# Altium PCB WX0.000.863.PcbDoc (part 2 of 4)
Units mil, origin at the board's own origin, x right, y up, seen from the top; angles counter-clockwise.
Board outline 6000 x 4000 mil, 2 copper layers (Top Layer, Bottom Layer); 210 components, 152 nets, 629 pads, 401 vias.
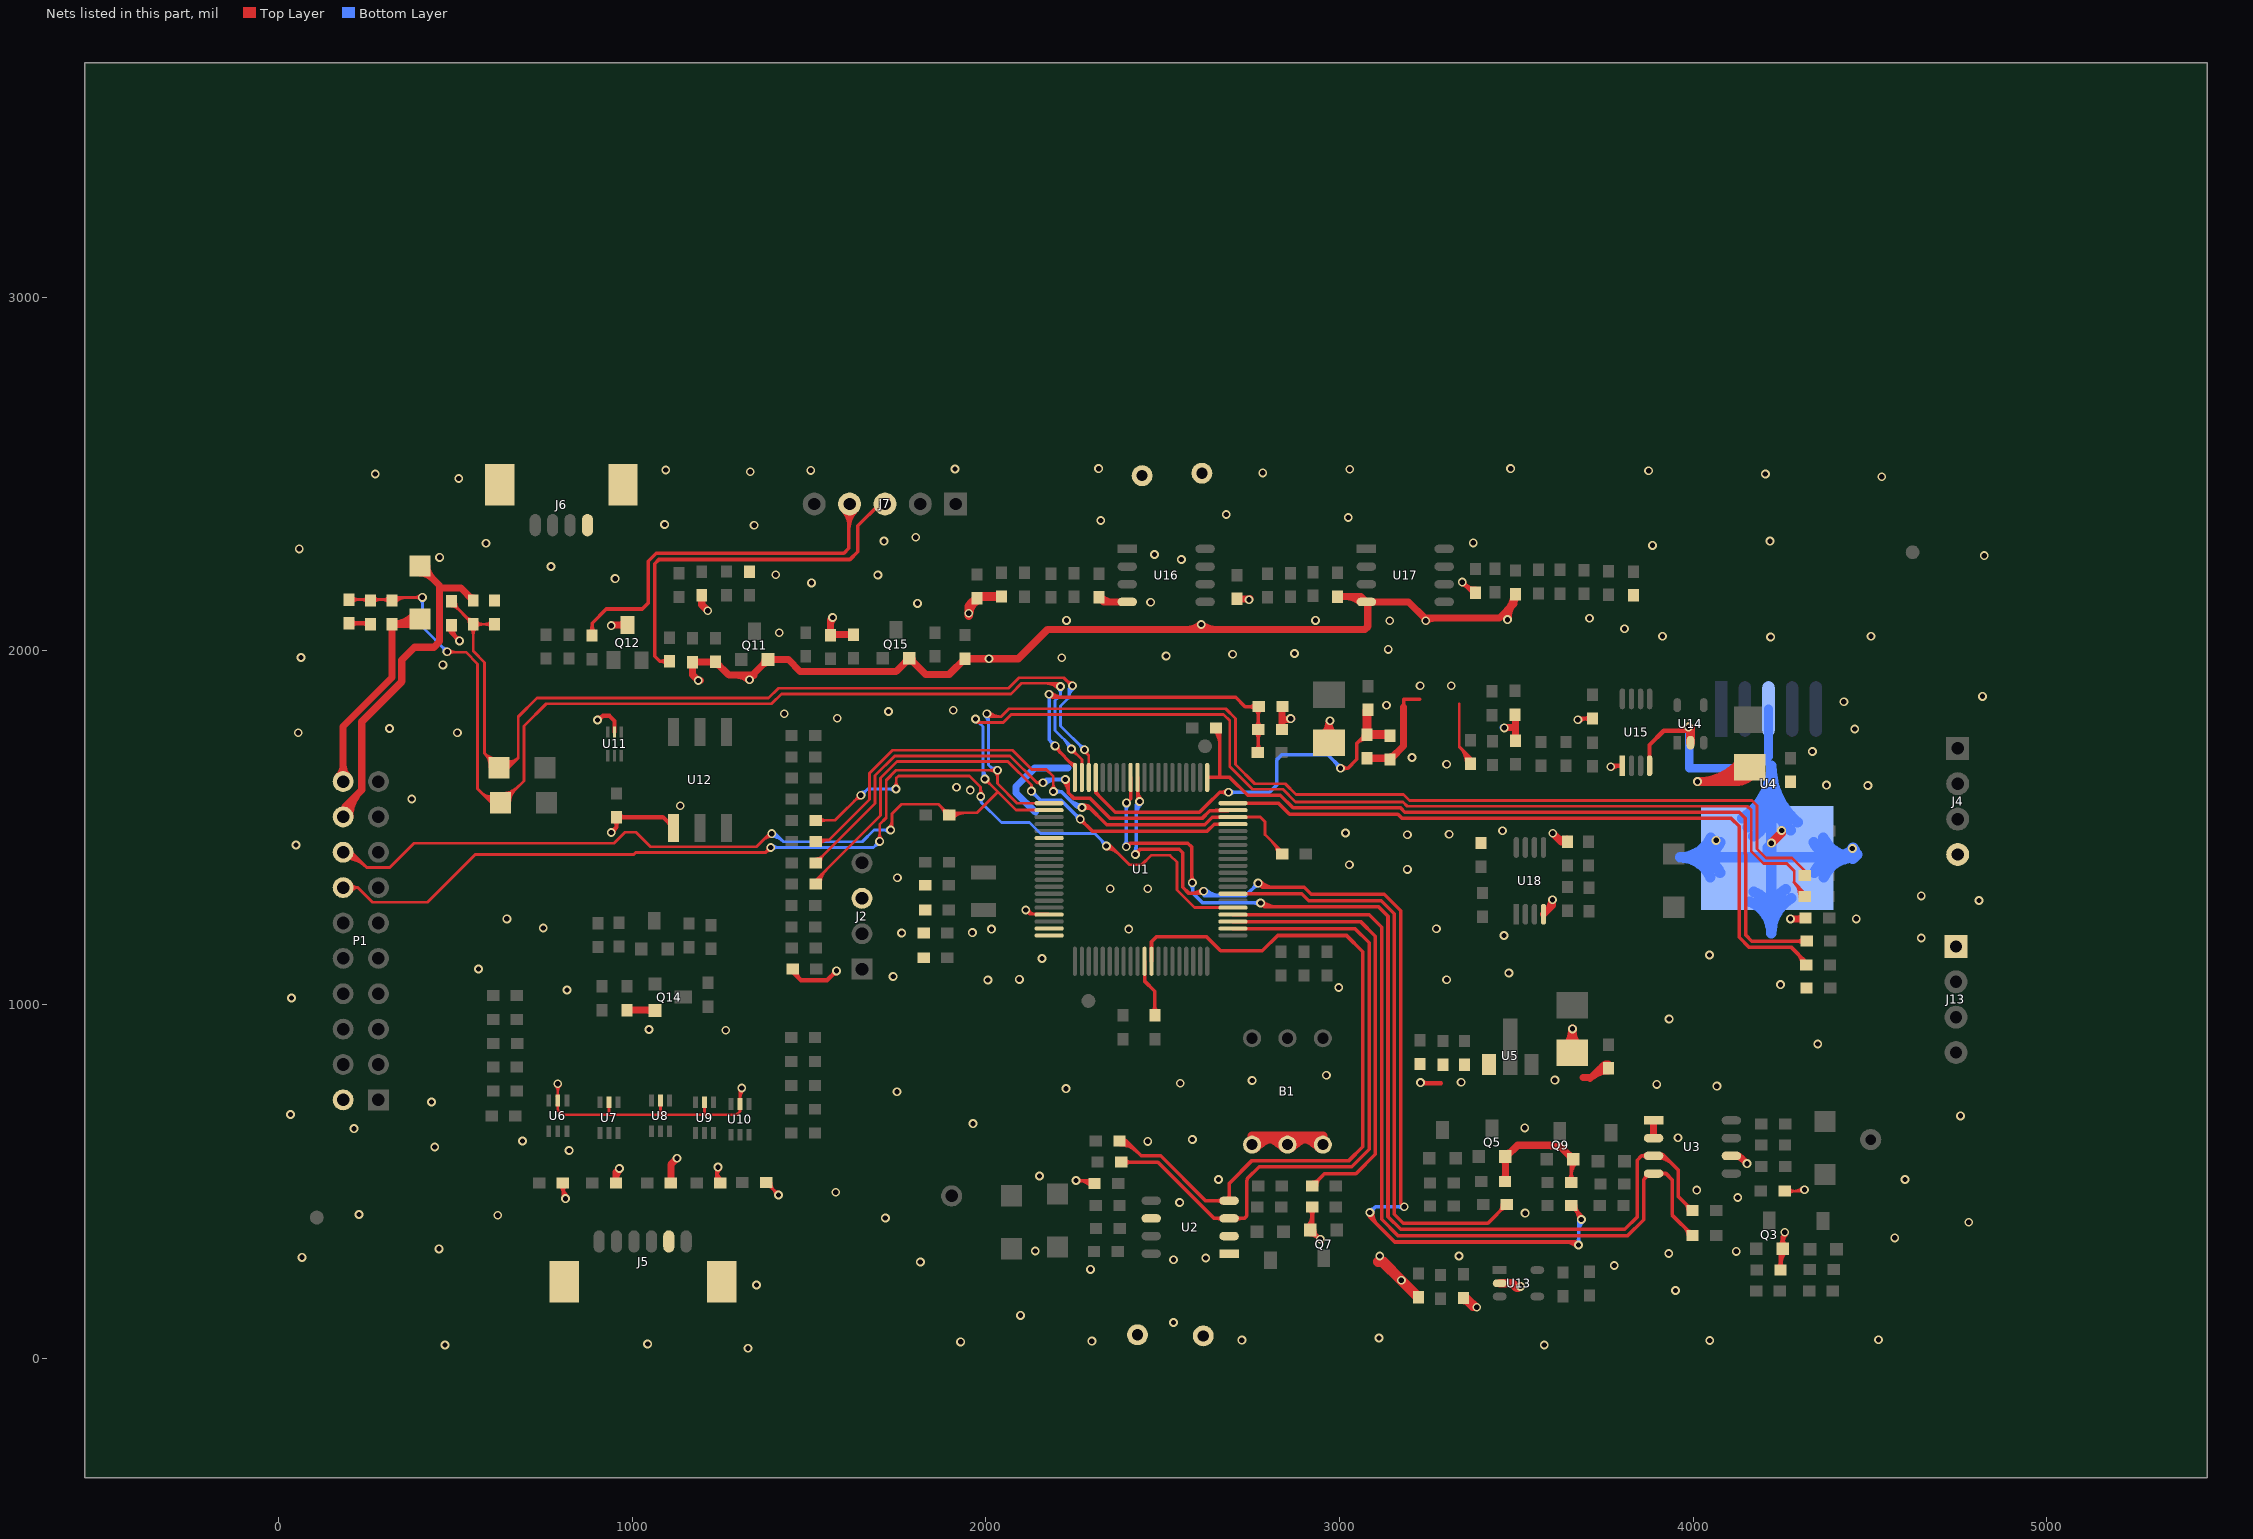
[diagram p2: the nets of this part, all layers, seen from the top]

## Via types
v1: diameter 25, hole 15, Top Layer to Bottom Layer, tented both sides, 401 vias

## Nets (pads, with @x,y where several pads share a name; then routed paths per layer and width w, separated by ;. In a path a pad name is that pad's centre, name@x,y a point inside that pad or via, vN(x,y) a via of type N, cw(c..) or ccw(c..) an arc to the next point about the centre after c; other vN are vias at no path point) (continued)
GND: B1.4 B1.5 B1.6 C1.2 C4.1 C5.1 C6.1 C7.2 C8.2 C10.2 C11.2 C12.1 C13.1 C14.2 C15.1 C16.1 C17.1 C18.1 C19.1 C20.1 C22.2 C23.2 C24.2 C25.2 C26.2 C27.1 C28.1 C29.1 C30.1 C31.1 C32.1 C33.2 C35.2 C36.1 C37.2 C38.2 C39.2 C40.2 C42.2 C44.2 C46.2 C47.2 C48.2 C49.2 J2.3 J4.4 J5.5 J5.7 J5.8 J6.1 J6.5 J6.6 J13.1 P1.2 pad.2 pad.3 pad.4 pad.5 Q3.E Q5.E Q7.E Q9.E Q11.E Q12.3 Q14.E Q15.E R12.1 R14.2 R20.2 R44.2 R54.2 R59.2 R60.2 R73.2 R74.2 R83.1 R86.2 R89.1 R92.2 R103.2 R107.1 R108.2 R112.2 R117.2 U1.17 U2.1 U2.2 U2.6 U3.1 U3.2 U3.6 U4.0 U4.3 U5.1 U6.2 U7.2 U8.2 U9.2 U10.2 U11.2 U12.1 U13.2 U14.2 U15.1 U15.4 U16.4 U17.4 U18.4 | length 15960.5
  Top Layer w8: v1@783.99,769.99 cw(c769.48,755.48) 790,755.48 cw(c810.52,755.48) v1@796.01,769.99 ; U6.2@787.96,716.42 cw(c783.02,711.49) 790,711.49 cw(c796.98,711.49) U6.2@792.04,716.42 ; U6.2@787.96,740.19 ccw(c783.02,745.13) 790,745.13 ccw(c796.98,745.13) U6.2@792.04,740.19 ; v1(790,776) U6.2@790,728.31 790,702 803.97,688.03 935,688.03 ; C22.2@796.38,486.87 cw(c776.75,467.24) 804.51,467.24 cw(c832.27,467.24) C22.2@812.64,486.87 ; 804.51,470.29 ccw(c831.29,470.29) v1@812.35,451.35 ; C22.2@804.51,489.61 ccw(c850.61,489.61) v1@818.01,457.01 ; C22.2@804.51,495 804.51,458.49 v1(812,451) ; U7.2@932.96,711.42 cw(c928.02,706.49) 935,706.49 cw(c941.98,706.49) U7.2@937.04,711.42 ; U7.2@935,723.31 935,688.03 ; U8.2@1077.96,716.42 cw(c1073.02,711.49) 1080,711.49 cw(c1086.98,711.49) U8.2@1082.04,716.42 ; 1080,689.03 U8.2@1080,728.31 ; U9.2@1202.96,711.42 cw(c1198.02,706.49) 1205,706.49 cw(c1211.98,706.49) U9.2@1207.04,711.42 ; U9.2@1205,723.31 1205,688.03 ; U10.2@1302.96,706.42 cw(c1298.02,701.49) 1305,701.49 cw(c1311.98,701.49) U10.2@1307.04,706.42 ; U10.2@1302.96,730.19 ccw(c1298.02,735.13) 1305,735.13 ccw(c1311.98,735.13) U10.2@1307.04,730.19 ; U10.2@1305,731.41 cw(c1342.59,731.41) v1@1316.01,757.99 ; 1305,750.72 cw(c1323.28,750.72) v1@1310.35,763.65 ; v1(1310,764) 1309,765 1305,761 U10.2@1305,718.31 1305,697 1296.03,688.03 1205,688.03 ; C26.2@1379,497 1413.98,462.02 v1(1413.98,461) ; C26.2@1381,485.5 cw(c1381,462.57) 1397.22,478.78 ; C26.2@1392.5,497 ccw(c1425.09,497) 1402.05,473.95 ; 1398.75,477.25 cw(c1382.51,461) v1@1405.48,461 ; 1401.21,474.79 ccw(c1413.98,487.56) v1@1413.98,469.5 ; v1(2113,1267) 2123.84,1256.16 2136.24,1256.16 ; v1@2113.49,1267.09 ccw(c2126.62,1269.52) 2126.62,1256.16 ; v1@2121.36,1268.54 ccw(c2136.24,1271.29) 2136.24,1256.16 ; 2134,1256.16 cw(c2134,1244.34) U1.17@2142.36,1252.7 ; U1.17@2179.14,1254.05 2177.16,1256.03 2136.37,1256.03 ; v1(2254.98,502) C20.1@2312.49,502 ; v1@2258.43,502 cw(c2258.43,446.92) C20.1@2297.38,485.87 ; v1@2260.99,495.99 cw(c2275.51,481.48) 2275.51,502 cw(c2275.51,522.52) v1@2260.99,508.01 ; 2277.75,502 cw(c2277.75,466.24) C20.1@2303.03,491.53 ; 3338.68,1849.32 3338.68,1728.63 3370,1697.31 R89.1@3370,1680 ; 3339.54,1727.77 cw(c3293.77,1682) R89.1@3358.5,1682 ; 3353.2,1714.11 cw(c3321.08,1682) R89.1@3366.5,1682 ; 3366.85,1700.46 cw(c3348.4,1682) R89.1@3374.5,1682 ; C19.1@4258.48,472 v1@4310.98,472 ; C19.1@4268.61,463.87 cw(c4288.24,444.24) 4288.24,472 cw(c4288.24,499.76) C19.1@4268.61,480.13 ; 4284.81,472 ccw(c4284.81,506.18) v1@4308.97,482.01 ; 935,688.03 1205,688.03 ; 2136.24,1256.16 cw(c2136.24,1249.12) 2142.12,1253 ccw(c2136.38,1249.07) 2136.38,1256.03 ; 2136.24,1256.16 2136.37,1256.03
  Top Layer w10: C25.2@1239,497 v1@1239,532.02 ; 1239,512.28 cw(c1270.7,512.28) v1@1248.29,534.7 ; 1239,512.54 ccw(c1260.09,512.54) C25.2@1247.8,495.41 ; v1(1242.98,540) 1242.98,536 v1@1239,532.02 ; C25.2@1253.63,503.53 cw(c1274.05,532.02) v1@1239,532.02 ; 3181.48,1841 3181.48,1862.49 3227.39,1862.49 ; R54.2@3647.56,504.42 ccw(c3629.64,522.35) 3654.98,522.35 ccw(c3680.33,522.35) R54.2@3662.41,504.42 ; R54.2@3654.98,497 3654.98,556 Q9.E@3660.98,562 ; 3654.98,516.13 cw(c3706.85,516.13) Q9.E@3670.18,552.81 ; 3654.98,540.27 cw(c3682.71,540.27) Q9.E@3663.11,559.88
  Top Layer w12: C30.1@199.98,2077.51 258.48,2077.51 R74.2@260.98,2075 ; C30.1@206.7,2070.79 cw(c222.92,2054.57) 222.92,2077.51 cw(c222.92,2100.44) C30.1@206.7,2084.23 ; 236.82,2077.51 cw(c236.82,2052.84) R74.2@254.27,2070.28 ; 239.28,2077.51 ccw(c239.28,2098.71) R74.2@254.27,2083.72 ; C29.1@487.84,2071.77 ccw(c503.89,2062.39) 490.75,2049.25 ; C29.1@490,2072.51 490,2050 ; C29.1@498.2,2065.72 ccw(c517.77,2054.28) 501.74,2038.26 ; v1@505.5,2028 ccw(c489.81,2028) 500.9,2039.1 ccw(c512,2050.19) v1@512,2034.5 ; v1(512,2028) 490,2050 ; v1(902,1804) 906,1804 918,1816 ; v1@902.62,1810.47 ccw(c904.44,1829.56) 918,1816 ; v1(941,1486) 955.98,1500.98 C27.1@955.98,1529.51 1086.94,1529.51 U12.1@1117.2,1499.25 ; v1@941,1492.5 ccw(c941,1508.19) 952.1,1497.1 ccw(c963.19,1486) v1@947.5,1486 ; C27.1@949.27,1520.79 cw(c933.05,1504.57) 955.98,1504.57 cw(c978.92,1504.57) C27.1@962.7,1520.79 ; U11.2@950.3,1769.97 950.3,1801.7 936,1816 918,1816 ; C27.1@962.7,1522.79 cw(c978.92,1506.57) 978.92,1529.51 cw(c978.92,1552.44) C27.1@962.7,1536.23 ; C4.1@1454.14,1100 1454.14,1091.86 1477.6,1068.4 1551.4,1068.4 v1(1578,1095) ; C4.1@1465.23,1098.08 ccw(c1491.88,1092.6) 1472.64,1073.36 ; v1@1571.5,1095 cw(c1555.81,1095) 1566.9,1083.9 cw(c1578,1072.81) v1@1578,1088.5 ; Q7.E@2909.07,370.49 ccw(c2875.49,404.07) 2922.98,404.07 ; R44.2@2916.27,420.28 cw(c2900.05,404.07) 2922.98,404.07 ; Q7.E@2917.56,350 cw(c2917.56,321.03) 2938.04,341.51 cw(c2958.53,362) Q7.E@2929.56,362 ; R44.2@2922.98,427 2922.98,367.42 Q7.E@2917.56,362 2949.56,330 v1@2949.98,330 ; R44.2@2929.7,420.28 ccw(c2945.92,404.07) 2922.98,404.07 ; Q7.E@2930.75,348.81 ccw(c2945.98,364.05) v1@2945.98,342.5 ; v1@3227.98,780 v1(3228.98,779) ; v1@3228.98,784 v1(3228.98,779) ; v1@3233.58,783.6 ccw(c3249.51,799.52) 3249.51,777 ; 3287,777 3230.98,777 v1(3228.98,779) ; v1@3347,2187.5 cw(c3347,2171.81) 3358.1,2182.9 cw(c3369.19,2194) v1@3353.5,2194 ; v1(3347,2194) 3377.02,2163.98 C44.2@3385,2163.98 ; v1@3351.99,2189.01 ccw(c3384.65,2221.66) C44.2@3384.94,2175.48 ; v1(3674,1805) 3672,1805 3675.49,1808.49 C35.2@3715,1808.49 ; v1@3678.6,1800.4 cw(c3698.12,1780.88) 3698.12,1808.49 ; C35.2@3708.28,1801.77 ccw(c3692.07,1785.56) 3692.07,1808.49 ccw(c3692.07,1831.43) C35.2@3708.28,1815.21 ; v1(3767,1672) 3767,1673 3769,1675 U15.1@3800,1675 ; v1@3771.6,1667.4 cw(c3789.94,1649.07) 3789.94,1675 ; U15.4@3876.77,1675 3876.77,1733.77 3917,1774 3977,1774 v1(3987,1784) ; 3947.17,1774 ccw(c3947.17,1823.83) v1@3982.4,1788.6 ; 3976.14,1774 ccw(c3976.14,1794.86) v1@3990.89,1780.11 ; R14.2@4240.27,255.72 ccw(c4224.05,271.93) 4246.98,271.93 ccw(c4269.92,271.93) R14.2@4253.7,255.72 ; Q3.E@4244.5,317.49 ccw(c4224.01,337.97) 4252.98,337.97 ccw(c4281.95,337.97) Q3.E@4261.47,317.49 ; R14.2@4246.98,249 4246.98,303 Q3.E@4252.98,309 4252.98,339.98 4259,346 v1(4259,356) ; 4246.98,265.54 cw(c4296.44,265.54) Q3.E@4261.47,300.51 ; Q3.E@4252.98,325.78 cw(c4289.22,325.78) v1@4263.6,351.4 ; 4252.98,338.89 cw(c4264.43,338.89) v1@4260.97,349.81 ; 490,2050 cw(c507.39,2050) 496.14,2063.26 ccw(c507.39,2050) 490,2050 ; 490,2050 ccw(c472.61,2050) 483.86,2063.26 cw(c472.61,2050) 490,2050
  Top Layer w20: v1(941,2071) 943,2073 Q12.3@987,2073 ; C23.2@954.51,495 954.51,526.51 v1(964,536) ; C23.2@954.51,507.05 cw(c992.95,507.05) v1@965.77,534.23 ; Q12.3@979.93,2065.93 ccw(c962.86,2048.86) 962.86,2073 ccw(c962.86,2097.14) Q12.3@979.93,2080.07 ; R59.2@985,983.98 1064,983.98 Q14.E@1065,982.98 ; 1043.27,983.98 cw(c1043.27,961.26) Q14.E@1059.34,977.33 ; C24.2@1109.51,495 1109.51,547.52 v1(1126.98,565) ; v1@1194,1916 v1(1187,1916) 1171,1932 R103.2@1171,1968 1235.51,1968 C38.2@1236,1968.49 1273.49,1931 1340,1931 Q11.E@1384,1975 1441.83,1975 1475.13,1941.7 1746.7,1941.7 Q15.E@1784,1979 1829.6,1933.4 1896.91,1933.4 C39.2@1941,1977.49 v1(2009,1977.49) 2092,1977.49 2175.11,2060.6 3072.6,2060.6 3080,2068 3080,2134 U17.4@3076,2138 ; C36.1@1197,2156.51 1197,2130 v1(1214,2113) ; C36.1@1201.08,2150.83 ccw(c1214.88,2138.39) 1201.75,2125.25 ; C38.2@1236,1960.99 cw(c1236,1942.88) C38.2@1248.8,1955.69 ; 1294.58,1931 cw(c1294.58,1880.58) v1@1330.23,1916.23 ; 1342.86,1931 cw(c1342.86,1928.86) 1344.37,1930.37 ; Q11.E@1376,1975 cw(c1356.69,1975) 1370.34,1961.34 cw(c1384,1947.69) Q11.E@1384,1967 ; Q11.E@1389.66,1969.34 cw(c1403.31,1955.69) 1403.31,1975 cw(c1403.31,1994.31) Q11.E@1389.66,1980.66 ; 1561,2073.48 cw(c1587.52,2073.48) v1@1568.77,2092.23 ; v1(1567,2094) 1561,2088 R107.1@1561,2044 1562.51,2045.51 C40.2@1626,2045.51 ; Q15.E@1776,1979 cw(c1756.69,1979) 1770.34,1965.34 cw(c1784,1951.69) 1784,1971 cw(c1784,1951.69) 1797.66,1965.34 cw(c1811.31,1979) Q15.E@1792,1979 ; C39.2@1928.2,1964.69 cw(c1941,1951.88) C39.2@1941,1969.99 ; R108.2@2320,2151 2333,2138 U16.4@2400,2138 ; R108.2@2323.89,2152.89 ccw(c2359.83,2188.83) 2359.83,2138 ; 2570.61,2060.6 ccw(c2570.61,2112.39) v1@2607.23,2075.77 ; 2596.63,2061.63 ccw(c2599.1,2064.1) 2599.1,2060.6 ; v1@2610.77,2075.77 ccw(c2647.39,2112.39) 2647.39,2060.6 ; 2618.9,2060.6 ccw(c2618.9,2064.1) 2621.37,2061.63 ; C42.2@2710,2146.49 2746.39,2146.49 2746.9,2147 2746.9,2146.9 v1(2744,2144) ; C31.1@2837.49,1777 2837.49,1806 ; R92.2@2839,1842 2837.49,1840.49 2837.49,1806 ; v1(2862,1808) 2865,1808 2863,1806 2837.49,1806 ; C10.2@2952.32,1761.06 ccw(c2920.47,1799) v1@2970,1799 ; C10.2@2970,1740 v1@2970,1799 ; 2970,1788.72 cw(c2986.28,1788.72) v1@2974.77,1800.23 ; v1(2973,1802) v1@2970,1799 ; C10.2@2987.68,1761.06 cw(c3019.53,1799) v1@2970,1799 ; R112.2@2995,2153 3061,2153 U17.4@3076,2138 ; 3019.4,2153 cw(c3019.4,2096.96) U17.4@3059.03,2136.59 ; U17.4@3074.59,2136.59 cw(c3061.51,2123.51) 3080,2123.51 ; U17.4@3076.29,2137.71 cw(c3072.63,2134.04) U17.4@3077.56,2132.43 ; R86.2@3077.98,1696 3146.48,1696 3181.48,1731 3181.48,1841 ; 3126.11,1696 cw(c3126.11,1677.63) C28.1@3139.1,1690.62 ; C28.1@3142.98,1700.01 ccw(c3142.98,1718.12) C28.1@3155.79,1705.31 ; 3236.78,2096.39 cw(c3225.4,2085) v1@3241.5,2085 ; v1@3245.77,2083.23 cw(c3267.42,2061.58) 3267.42,2092.2 ; R12.1@3362.8,157.2 ccw(c3350,144.39) 3350,162.5 cw(c3350,115.42) v1@3383.29,148.71 ; R12.1@3363.25,156.75 ccw(c3388,181.51) v1@3388,146.5 ; Q5.E@3463.33,564.34 cw(c3449.67,550.69) 3468.98,550.69 cw(c3488.3,550.69) Q5.E@3474.64,564.34 ; R20.2@3464.1,503.89 ccw(c3452.29,515.69) 3468.98,515.69 ; v1(3466,1782) 3472,1782 3473,1783 3498,1783 ; R20.2@3467.98,500 3468.98,501 Q5.E@3468.98,570 3471.98,570 3503.98,602 3594.81,602 3597.61,599.2 3623.78,599.2 Q9.E@3660.98,562 ; Q5.E@3468.98,578 ccw(c3468.98,604.56) 3487.76,585.78 ; 3474.47,2114.47 ccw(c3430.94,2158) R117.2@3492.5,2158 ; v1@3477.48,2088.3 cw(c3530.84,2094.82) 3492.83,2132.83 ; C12.1@3492.1,1813.62 cw(c3477.84,1799.36) 3498,1799.36 ; 3492.83,2132.31 cw(c3523.6,2132.31) R117.2@3501.88,2154.1 ; C12.1@3495.98,1819.51 3498,1817.49 3498,1783 ; R60.2@3498,1746 3498,1783 ; R117.2@3498,2160 3492.83,2160 3492.83,2132.83 ; U18.4@3576.77,1255 3602,1280.23 v1(3602,1296) ; 3586.58,1264.81 ccw(c3555.39,1296) v1@3599.5,1296 ; v1(3603,1484) 3627,1460 R83.1@3645,1460 ; 3613,1474 ccw(c3633.48,1494.48) R83.1@3643.16,1467.18 ; Q9.E@3652.98,562 ccw(c3633.67,562) 3647.33,575.66 ccw(c3660.98,589.31) Q9.E@3660.98,570 ; 3688,793 3711,793 3737.51,819.51 C18.1@3760,819.51 ; 3708.8,790.8 cw(c3760,739.6) C18.1@3760,812.01 ; 3726.26,808.26 cw(c3746.65,787.88) C18.1@3757.86,814.44 ; 3742.94,824.94 cw(c3760,807.89) C18.1@3760,832.01 ; U3.2@3887.98,622 U3.1@3887.98,672 ; U3.6@4107.98,572 4129.98,572 v1(4151.98,550) ; U3.6@4123.54,570 cw(c4123.54,549.62) 4137.95,564.03 ; v1(4275,1242) 4315.51,1242 C32.1@4317.51,1244 ; 4297.4,1242 ccw(c4297.4,1262.11) C32.1@4311.62,1247.89 ; U17.4@3076,2138 3195.17,2138 3240.97,2092.2 3452.2,2092.2 3492.83,2132.83 ; v1@1334.5,1918 cw(c1352.61,1918) 1339.8,1930.8 ccw(c1352.61,1918) v1@1334.5,1918 ; R12.1@3350,170 3376,144 v1(3388,144) 3362,170 R12.1@3350,170
  Top Layer w25: v1@1952,2099.93 cw(c2003.7,2099.93) C47.2@1976.57,2143.94 ; v1@1952,2115.35 cw(c1980.65,2115.35) C47.2@1975.54,2143.54 ; C47.2@1965.78,2139.27 ccw(c1999.06,2106) v1(1952,2106) 1952,2125.49 C47.2@1975,2148.49 1980,2153.49 C48.2@2045,2153.49 ; B1.4@2744.58,612.03 cw(c2784.6,572) 2784.6,628.61 ; B1.4@2753,628.61 B1.6@2953,628.61 ; 2761.04,628.61 cw(c2761.04,511.65) B1.5@2843.74,594.35 ; B1.4@2762.26,594.35 cw(c2844.96,511.65) 2844.96,628.61 ; 2821.4,628.61 cw(c2821.4,572) B1.5@2861.42,612.03 ; B1.5@2844.58,612.03 cw(c2884.6,572) 2884.6,628.61 ; 2861.04,628.61 cw(c2861.04,511.65) B1.6@2943.74,594.35 ; B1.5@2862.26,594.35 cw(c2944.96,511.65) 2944.96,628.61 ; 2921.4,628.61 cw(c2921.4,572) B1.6@2961.42,612.03 ; U13.2@3453,211.6 3488.4,211.6 3501,199 v1@3505,199 ; C14.2@3640.31,881.04 ccw(c3597.63,923.72) 3657.98,923.72 ccw(c3718.34,923.72) C14.2@3675.66,881.04 ; C14.2@3657.98,863.36 3657.98,930 v1(3658.98,931) ; U14.2@3992.4,1740 3992.4,1778.6 v1(3987,1784) cw(c3973.96,1770.96) 3992.4,1770.96 ; 4066.04,1630 ccw(c4066.04,1743.43) C11.2@4152.5,1670 ; 4120.08,1630 ccw(c4120.08,1697.54) C11.2@4171.55,1653.82 ; C11.2@4129.29,1660.72 cw(c4106.07,1651.43) 4123.75,1633.75 cw(c4150.95,1606.55) C11.2@4151.89,1645.01 ; C11.2@4133.45,1686.18 cw(c4012.01,1789.33) v1(4012,1630) 4120,1630 C11.2@4160,1670 ; v1(4221,1456) 4250,1485 v1(4250,1492) cw(c4233.1,1492) 4245.05,1480.05
  Top Layer w30: 3110,272 3123,272 v1(3174.9,220.1) 3222.51,172.49 C1.2@3223,172.49
  Bottom Layer w8: v1@1310,763 v1(1310,764)
  Bottom Layer w12: v1@3766,1675 3766,1673 v1(3767,1672)
  Bottom Layer w20: 2140,1544 2085.71,1598.29 2085.71,1616.29 2137.42,1668 2232,1668 ; v1(2862,1808) 2864.2,1808 v1@2865.2,1807 ; v1@3463,1783 3463.3,1783 3464.3,1782 v1(3466,1782)
  Bottom Layer w25: v1@3989,1782 3989,1668 4180,1668 4213,1701 U4.3@4213,1835.18 ; U4.0@4209.06,1414.02 4209.06,1416 4209.06,1444.06 v1(4221,1456) ccw(c4249.82,1427.18) U4.0@4209.06,1427.18
  Bottom Layer w30: 4009.07,1416 cw(c4009.07,1343.02) U4.0@4075.82,1372.52 ; 4010.47,1416 ccw(c4010.47,1489.63) U4.0@4076.98,1458.05 ; U4.0@4048.38,1360.4 ccw(c3963.01,1322.66) 3963.01,1416 ; U4.0@4049.88,1470.92 cw(c3963.01,1512.17) 3963.01,1416 ; U4.0@4138.72,1526.46 ccw(c4045.81,1674.99) 4221,1674.99 ; U4.0@4154.63,1501.03 ccw(c4079.68,1620.84) 4221,1620.84 ; U4.0@4160.45,1290.61 cw(c4125.41,1201.67) 4221,1201.67 cw(c4335.5,1201.67) U4.0@4276.92,1300.05 ; U4.0@4170.54,1475.6 ccw(c4113.56,1566.68) 4221,1566.68 ; U4.0@4171.44,1318.52 cw(c4142.77,1245.74) 4221,1245.74 ; 4221,1202 U4.0@4221,1416 ; 4221,1254.45 cw(c4304.07,1254.45) U4.0@4261.57,1325.83 ; 4221,1610.12 ccw(c4375.72,1610.12) U4.0@4275.53,1492.23 ; U4.0@4294.96,1515.09 cw(c4430.84,1674.99) 4221,1674.99 ; U4.0@4340.98,1458.4 ccw(c4408.33,1490.7) 4408.33,1416 ; U4.0@4342.15,1372.16 cw(c4409.74,1341.98) 4409.74,1416 ; U4.0@4368.03,1471.37 ccw(c4455.99,1513.56) 4455.99,1416 ; U4.0@4369.54,1359.93 cw(c4455.99,1321.32) 4455.99,1416 ; U4.0@4395.68,1416 ccw(c4395.68,1495.32) v1@4451.77,1439.23 ; 4451.5,1411.5 ccw(c4435.73,1427.27) v1@4451.8,1442.73 ; 4464,1424 4456,1416 ; 3963,1416 4209.06,1416 U4.0@4221,1416 ; U4.0@4221,1416 4456,1416 ; U4.0@4221,1416 v1(4221,1456) 4221,1675
  other v1: 1328,28 471,37 3579,37 1044,40 1929,46 2300,48 4047,50 2724,51 4524,52 3112,57 2531,101 2098,121 3950,191 3512,203 1352,207 2295.98,251 3777,262 1815,272 2531,278 2622,283 67,285 3113.98,289 3338,289 3931,296 4122,302 2140,303 454,309 2945.98,336 4570,340 4779,384 1716,396 620,404 228,406 3525,410 2548,440 4125.98,454 1576,469 4009.98,475 4314.98,476 2658,505 4599,505 2151.98,515 822,587 442,597 2458,613 690,614 2584,618 3956.98,623 214,649 3524,651 1964,663 4756,685 34,689 433,724 1749,753 2227,762 4067,769 3897,774 2550,777 3343.98,780 2753,785 3608.98,786 2963,800 4352,888 1265,927 1048,929 3932,959 37,1018 816,1041 2998,1048 4247,1056 2006,1069 3303,1070 2095,1071 1738,1079 3479,1089 566.02,1100 2158.98,1130 4046,1140 4645,1188 3465,1195 1762,1202 1962,1203 2015.98,1213 2404,1213 3274,1214 749,1216 646,1242 4461,1242 4808,1294 4645,1307 2352,1327 2458,1327 1750,1358 3192,1382 3028,1395 4450,1441 50,1451 4065,1464 3192,1480 3310,1481 3017,1485 3461,1491 1136,1562 377,1581 1956,1606 1917,1614 4494,1619 4377,1620 3303,1679 3205,1698 4337,1715 56,1768 506,1768 4457,1779 314,1780 1580,1809 1430,1822 1725,1828 1908,1832 3133,1846 4426,1856 4818,1871 3228,1901 3316,1901 1332,1918 465,1960 2215,1980 64,1981 2510,1985 2698,1990 2873,1992 3138,2004 4219,2039 3913,2041 4503,2041 1416,2051 3806,2062 2609,2074 3142,2085 3244,2085 2228,2086 2932,2086 3475,2088 3707,2092 1807,2134 2466,2137 1507,2192 952,2204 1695,2214 1406,2215 771,2238 2553,2258 456,2264 4823,2269 2477,2272 59,2288 3885,2298 587,2304 3378,2305 1712,2310 4217,2310 1802,2321 1345,2355 1092,2357 2325,2368 3025,2377 2680,2385 510,2487 4533,2492 274,2500 4204,2500 2783,2503 1334,2506 3874,2509 1505,2510 1095,2511 3029,2513 1913,2514 2319,2515 3484,2515
INA1_SCL: R29.1 U1.32 U2.4 | length 2335.7
  Top Layer w10: R29.1@2378,614 2397,614 ; R29.1@2380,603.5 cw(c2380,537.11) 2426.95,584.05 ; R29.1@2380,613.5 cw(c2380,571.25) 2409.87,601.13 ; R29.1@2380.33,613.62 cw(c2388.83,603.93) 2397.95,613.05 ; R29.1@2386.92,606.11 cw(c2395.89,595.89) 2405.5,605.5 ; R29.1@2389.39,609.3 cw(c2397,605.49) 2397,614 ; R29.1@2389.39,618.7 ccw(c2397,622.51) 2397,614 ; U1.32@2468.51,1122.16 2468.51,1177.53 2482.98,1192 2623.81,1192 2663.81,1152 2782.01,1152 2825,1194.99 3019.99,1194.99 3065.98,1149 3065.98,597.58 3027,558.6 2752.6,558.6 2687.98,493.98 U2.4@2687.98,445 ; U2.4@2662.98,445 U2.4@2687.98,445 ; U2.4@2667.48,440.05 ccw(c2655.53,428.1) 2655.53,445 ccw(c2655.53,461.9) U2.4@2667.48,449.95 ; U2.4@2683.03,449.95 ccw(c2671.08,461.9) 2687.98,461.9 ccw(c2704.88,461.9) U2.4@2692.93,449.95 ; 2397,614 2439.2,571.8 2461.37,571.8 2494.2,571.8 2621,445 U2.4@2687.98,445
INA1_SDA: R28.1 U1.42 U2.3 | length 2062.7
  Top Layer w10: R28.1@2383,554 2454,554 2486.83,554 2645.83,395 U2.3@2687.98,395 2731,395 2738,402 2738,405.57 2737.68,405.88 2737.68,502 2739.68,504 2739.68,507.8 2772.68,540.8 3034.37,540.8 3083.78,590.21 3083.78,1174.2 3043.31,1214.68 2849.98,1214.68 ; R28.1@2392.42,546.58 cw(c2410.35,528.65) 2410.35,554 cw(c2410.35,579.35) R28.1@2392.42,561.42 ; U2.3@2667.48,390.05 ccw(c2655.53,378.1) 2655.53,395 ccw(c2655.53,411.9) U2.3@2667.48,399.95 ; U1.42@2698.83,1214.68 2849.98,1214.68 ; U2.3@2708.49,390.05 cw(c2720.44,378.1) 2720.44,395 cw(c2720.44,411.9) U2.3@2708.49,399.95 ; 2925.31,1214.68 2849.98,1214.68
INA1_TS1: R39.2 U1.43 | length 1404.7
  Top Layer w10: U1.43@2698.83,1234.36 3059.62,1234.36 3101.58,1192.4 3101.58,655 ; 2951.98,516 R39.2@2922.98,487 2956.98,521 3046.58,521 3101.58,576 3101.58,655 ; 3101.58,623 3101.58,655 ; R39.2@2924.98,497.5 ccw(c2924.98,518.02) 2939.49,503.51 cw(c2924.98,518.02) R39.2@2924.98,497.5 ; R39.2@2935.48,487 cw(c2965.66,487) 2944.32,508.34 ccw(c2965.66,487) R39.2@2935.48,487
INA1_TS2: R19.2 U1.47 | length 1719.6
  Top Layer w10: U1.47@2698.83,1313.1 2893,1313.1 2912.69,1293.42 3118.36,1293.42 3154.98,1256.79 3154.98,1072 3154.98,407 3180.18,381.8 3419.78,381.8 R19.2@3472.98,435 ; 3451.65,413.66 ccw(c3430.31,435) R19.2@3460.48,435 ; 3456.47,418.49 cw(c3470.98,403.98) R19.2@3470.98,424.5
INA2_SCL: R47.1 U1.44 U3.4 | length 2510.2
  Top Layer w10: U1.44@2698.83,1254.05 3083.94,1254.05 3119.38,1218.6 3119.38,392.25 3165.44,346.2 3814.36,346.2 3859.78,391.63 3859.78,505 3876.78,522 U3.4@3887.98,522 3922.98,522 3940.18,504.8 3940.18,404.8 R47.1@3997.98,347 ; 3861.96,507.18 ccw(c3852.14,517) U3.4@3865.63,520.32 ; U3.4@3908.49,517.05 cw(c3920.44,505.1) 3920.44,522 cw(c3920.44,538.9) U3.4@3908.49,526.95 ; 3976.65,368.34 cw(c3955.31,347) R47.1@3985.48,347 ; 3981.47,363.51 ccw(c3995.98,378.02) R47.1@3995.98,357.5
INA2_SDA: R46.1 U1.72 U3.3 | length 3561.8
  Top Layer w10: v1(2397,1446) 2399.8,1446 2410,1456.2 ; v1(2398,1570) 2409.46,1581.46 U1.72@2409.46,1641.84 ; v1@2398.95,1453.24 ccw(c2401.92,1464.28) 2410,1456.2 ; v1@2404.5,1446 cw(c2415.85,1446) 2407.82,1454.02 ; v1@2578.7,1349.3 ccw(c2570.72,1357.28) 2582,1357.28 ; 2582,1366.93 ccw(c2606.94,1366.93) v1@2589.3,1349.3 ; v1(2584,1344) 2582,1344 2582,1445.2 2571,1456.2 2410,1456.2 ; v1@2775.23,1285.23 ccw(c2798.44,1308.44) 2798.44,1275.62 ; v1(2777,1287) 2778,1287 2778,1286 2788.38,1275.62 3022,1275.62 ; v1@2782.3,1292.3 ccw(c2822.59,1332.59) 2822.59,1275.62 ; 2999.98,1275.62 3022,1275.62 ; U3.3@3867.48,567.05 ccw(c3855.53,555.1) 3855.53,572 ccw(c3855.53,588.9) U3.3@3867.48,576.95 ; U3.3@3901.81,574.45 cw(c3908.55,564.91) 3916.81,573.17 ; U3.3@3903.54,565 cw(c3903.54,513.24) 3940.15,549.84 ; U3.3@3903.54,575 cw(c3903.54,547.38) 3923.07,566.91 ; U3.3@3907.58,566.28 cw(c3915.5,555.08) 3925.2,564.78 ; U3.3@3909.04,567.66 cw(c3917.98,560.61) 3917.98,572 ; U3.3@3909.04,576.34 ccw(c3917.98,583.39) 3917.98,572 ; 3976.65,438.34 cw(c3955.31,417) R46.1@3985.48,417 ; 3981.47,433.51 ccw(c3995.98,448.02) R46.1@3995.98,427.5 ; R46.1@3997.98,417 3957.98,457 3957.98,532 3917.98,572 ; 3022,1275.62 3110.98,1275.62 3137.18,1249.42 3137.18,399.63 3172.81,364 3806.98,364 3841.98,399 3841.98,560 3853.98,572 U3.3@3887.98,572 3917.98,572
  Bottom Layer w10: v1@2391.7,1451.3 ccw(c2378.89,1464.11) 2397,1464.11 ccw(c2415.11,1464.11) v1@2402.3,1451.3 ; v1@2392.7,1564.7 cw(c2382.31,1554.31) 2397,1554.31 ; v1(2397,1446) 2397,1569 v1(2398,1570) ; 2397,1549.48 cw(c2418.52,1549.48) v1@2403.3,1564.7 ; v1@2578.7,1338.7 cw(c2563.48,1323.48) 2585,1323.48 ; v1(2584,1344) 2585,1343 2585,1315 2613,1287 v1(2777,1287) ; 2585,1328.31 cw(c2599.69,1328.31) v1@2589.3,1338.7 ; v1@2771.7,1281.7 ccw(c2758.89,1268.89) 2758.89,1287 ccw(c2758.89,1305.11) v1@2771.7,1292.3
INA2_TS: R53.2 U1.71 | length 3503.9
  Top Layer w10: v1@2423,1426 2435.4,1438.4 ; v1@2423,1431.5 ccw(c2423,1444.78) 2432.39,1435.39 ; v1@2429.14,1576.86 U1.71@2429.14,1641.84 ; U1.71@2429.14,1606.25 ccw(c2467.25,1606.25) v1@2440.3,1579.3 ; v1@2430.47,1424.7 cw(c2447.49,1426.31) 2435.4,1438.4 ; 2585.82,1315 ccw(c2585.82,1350.18) v1@2610.7,1325.3 ; v1@2611,1315 2573,1315 2557,1331 2557,1428.4 2547,1438.4 2435.4,1438.4 ; v1@2768.23,1341.23 ccw(c2793.17,1366.17) 2793.17,1330.9 ; v1(2770,1343) 2782.1,1330.9 2900.37,1330.9 2920.06,1311.22 3126.78,1311.22 3172.78,1265.22 3172.78,438.22 ; v1@2775.3,1348.3 ccw(c2817.31,1390.31) 2817.31,1330.9 ; v1@3083.5,412 ccw(c3108.85,412) 3090.92,394.08 ; v1(3086,412) 3086,399 ; v1@3093.5,412 ccw(c3142.99,412) 3108,377 ; 3637.6,328.4 cw(c3637.6,281.61) v1@3670.68,314.7 ; R53.2@3654.98,432 v1@3683.98,403 ; R53.2@3656.98,421.5 cw(c3656.98,400.98) 3671.49,415.49 ; 3661.74,328.4 cw(c3661.74,305.76) v1@3677.75,321.77 ; R53.2@3663.4,423.58 cw(c3631.82,392) v1@3676.48,392 ; R53.2@3667.48,432 ccw(c3697.66,432) 3676.32,410.66 ; v1(3675.98,320) 3667.58,328.4 3156.6,328.4 3086,399 ; 3680.47,406.51 cw(c3665.96,392) v1@3686.48,392 ; 3086,399 cw(c3093.52,399) 3089.75,405.51 ccw(c3093.52,399) 3086,399 ; 3086,399 ccw(c3078.48,399) 3082.25,405.51 cw(c3078.48,399) 3086,399
  Bottom Layer w10: v1@2417.7,1429.3 ccw(c2400.07,1446.93) 2425,1446.93 ; v1@2425,1424 2425,1564 ; 2425,1437.28 ccw(c2436.28,1437.28) v1@2428.3,1429.3 ; 2425,1531.75 cw(c2477.25,1531.75) v1@2440.3,1568.7 ; 2425,1555.89 cw(c2453.11,1555.89) v1@2433.23,1575.77 ; v1@2614.23,1318.23 ccw(c2638.94,1342.93) 2638.94,1308 ; v1@2618,1308 2735,1308 v1(2770,1343) ; v1@2621.3,1325.3 ccw(c2663.08,1367.08) 2663.08,1308 ; v1@2762.5,1343 cw(c2744.39,1343) 2757.2,1330.2 cw(c2770,1317.39) v1@2770,1335.5 ; v1(3086,412) 3102,428 v1(3183,428) ; v1@3086,419.5 ccw(c3086,437.61) 3098.8,424.8 ccw(c3111.61,412) v1@3093.5,412 ; v1@3177.7,422.7 ccw(c3164.89,409.89) 3164.89,428 ccw(c3164.89,446.11) v1@3177.7,433.3 ; v1@3670.68,325.3 ccw(c3657.88,338.11) 3675.98,338.11 ccw(c3694.09,338.11) v1@3681.29,325.3 ; v1(3675.98,320) v1@3675.98,384 ; 3675.98,354.58 cw(c3721.4,354.58) v1@3689.29,386.7 ; 3675.98,378.72 cw(c3697.26,378.72) v1@3682.22,393.77
  other v1: 3683.98,392 2616,1320 2423,1424 2435,1574
INA_SCL: U1.19
INA_SDA: U1.20
INTP2: R31.2 U1.45 | length 1822.9
  Top Layer w8: R31.2@1518.78,1520.64 1573.64,1520.64 1646.9,1593.9 v1(1646.9,1591.53) ; R31.2@1528.91,1512.5 cw(c1548.54,1492.87) 1548.54,1520.64 cw(c1548.54,1548.4) R31.2@1528.91,1528.77 ; 1628.35,1575.35 cw(c1646.9,1556.8) v1@1646.9,1583.03 ; 1634.06,1581.06 ccw(c1623.59,1591.53) v1@1638.4,1591.53 ; v1@1739.99,1615.01 ccw(c1723.07,1631.93) 1747,1631.93 ; v1(1746,1609) 1747,1608 1747,1640.06 1753.14,1646.2 1954,1646.2 1985,1615.2 1985,1588 v1(1986,1588) ; 1747,1627.11 ccw(c1764.11,1627.11) v1@1752.01,1615.01 ; v1@1979.99,1594.01 ccw(c1967.89,1606.11) 1985,1606.11 ; 1985,1610.93 ccw(c2008.93,1610.93) v1@1992.01,1594.01 ; v1@2341,1439.5 cw(c2341,1390.01) 2376,1425 ; v1@2341,1447.5 cw(c2341,1417.32) 2362.34,1438.66 ; v1(2341,1448) 2342,1449 v1@2347,1449 ; v1@2352,1449 2406,1395 2441,1395 2467.6,1421.6 2521,1421.6 2540.2,1402.4 2540.2,1324.04 2590.51,1273.73 U1.45@2698.83,1273.73
  Bottom Layer w8: v1(1646.9,1591.53) 1648.53,1591.53 1666,1609 v1(1746,1609) ; v1@1646.9,1600.03 ccw(c1646.9,1624.5) 1664.2,1607.2 ; v1@1655.4,1591.53 cw(c1671.97,1591.53) 1660.25,1603.25 ; v1@1739.99,1602.99 ccw(c1725.48,1588.48) 1725.48,1609 ccw(c1725.48,1629.52) v1@1739.99,1615.01 ; v1@1981.54,1580.77 cw(c1975.49,1570.97) 1987,1570.97 cw(c2001.58,1570.97) v1@1991.74,1581.73 ; v1(1986,1588) 1987,1587 1987,1571 2044,1514 2063,1514 2124,1514 2155,1483 2308,1483 2341,1450 v1(2341,1448) ; 2325.08,1465.92 cw(c2307.15,1448) v1@2332.5,1448 ; 2329.9,1461.1 ccw(c2341,1472.19) v1@2341,1456.5
IRED_RXD: J7.3 R101.1 | length 1098.4
  Top Layer w10: R101.1@1098.58,1962.58 ccw(c1080.65,1944.65) 1080.65,1970 ccw(c1080.65,1995.35) R101.1@1098.58,1977.42 ; R101.1@1106,1970 1078,1970 1064,1984 1064,2246 1076,2258 1616,2258 1638,2280 1638,2353 J7.3@1700,2415
IRED_TXD: J7.4 R100.1 | length 1259.1
  Top Layer w10: R100.1@879.58,2052.42 ccw(c861.65,2070.35) 887,2070.35 ccw(c912.35,2070.35) R100.1@894.42,2052.42 ; R100.1@887,2043 887,2078 927,2118 1029.2,2118 1046.2,2135 1046.2,2253.37 1068.63,2275.8 1599,2275.8 1613,2289.8 1613,2402 J7.4@1600,2415 ; J7.4@1595.55,2395.55 cw(c1553.44,2353.44) 1613,2353.44 ; J7.4@1602.63,2402.63 cw(c1577.58,2377.58) 1613,2377.58 ; 1613,2343.78 cw(c1686.22,2343.78) J7.4@1634.45,2395.55 ; 1613,2367.92 cw(c1662.08,2367.92) J7.4@1627.37,2402.63
KEY_INT: U1.6
LEDIN: R88.1 U1.31 | length 205.1
  Top Layer w10: U1.31@2448.83,1122.16 2448.83,1066.17 2478,1037 R88.1@2478,969 ; R88.1@2470.58,978.42 ccw(c2452.65,996.35) 2478,996.35 ccw(c2503.35,996.35) R88.1@2485.42,978.42
LVCAP: C31.2 R91.2 R92.1 U1.80 | length 1331.7
  Top Layer w10: v1@2177.23,1875.23 ccw(c2193.24,1891.24) 2193.24,1868.6 ; v1@2178,1876 v1(2179,1877) 2187.4,1868.6 2706.4,1868.6 2733,1842 R92.1@2772,1842 2770.49,1840.49 C31.2@2770.49,1777 ; v1@2184.3,1882.3 ccw(c2217.39,1915.39) 2217.39,1868.6 ; v1@2196,1727 2251.98,1671.02 U1.80@2251.98,1641.84 ; v1@2203.5,1731 ccw(c2231.26,1731) 2211.63,1711.37 ; 2239.76,1683.24 ccw(c2251.98,1695.46) U1.80@2251.98,1678.18 ; C31.2@2761.51,1768.02 C31.2@2770.49,1777 ; R92.1@2762.58,1849.42 cw(c2744.65,1867.35) 2744.65,1842 cw(c2744.65,1816.65) 2762.58,1834.58 cw(c2743.47,1815.47) 2770.49,1815.47 ; C31.2@2763.07,1769.58 cw(c2745.14,1751.65) 2770.49,1751.65 cw(c2795.84,1751.65) C31.2@2777.92,1769.58 ; C31.2@2763.07,1784.42 ccw(c2745.14,1802.35) 2770.49,1802.35 ccw(c2795.84,1802.35) C31.2@2777.92,1784.42 ; R91.2@2763.58,1719.42 ccw(c2746.88,1736.12) 2770.49,1736.12 ; R91.2@2769,1712 2770.49,1713.49 C31.2@2770.49,1777 ; 2770.49,1738.58 ccw(c2797.58,1738.58) R91.2@2778.42,1719.42 ; 2770.49,1817.84 cw(c2794.16,1817.84) R92.1@2777.42,1834.58
  Bottom Layer w10: v1(2179,1877) 2179,1748 v1(2196,1731) ; v1@2188.5,1731 ccw(c2170.39,1731) 2183.2,1743.8 ccw(c2196,1756.61) v1@2196,1738.5
LVDIN: C28.2 R84.2 R86.1 U1.77 | length 1332.6
  Top Layer w10: U1.77@2311.03,1641.84 2311.03,1598.95 2366.28,1543.7 2395,1543.7 2604.18,1543.7 2625.72,1565.24 2626.24,1565.24 2661,1600 v1(2686,1600) ; U1.77@2311.94,1606.41 ccw(c2332.13,1606.41) 2317.85,1592.13 ; v1@2680.7,1594.7 ccw(c2667.89,1581.89) 2667.89,1600 ccw(c2667.89,1618.11) v1@2680.7,1605.3 ; v1(3003,1668) 3024,1668 3049,1693 3049,1738.02 R86.1@3075.98,1765 ; v1@3008.3,1662.7 cw(c3021.11,1649.89) 3021.11,1668 cw(c3021.11,1686.11) v1@3008.3,1673.3 ; 3049.82,1738.83 cw(c3077.98,1710.67) R86.1@3077.98,1750.5 ; R86.1@3064.3,1753.32 ccw(c3056.62,1761) R86.1@3067.48,1761
  Top Layer w25: R86.1@3075.98,1765 R86.1@3077.98,1763 ; R84.2@3080,1833 3077.98,1830.98 R86.1@3077.98,1763 ; C28.2@3142.98,1759.51 3139.49,1763 R86.1@3077.98,1763
  Bottom Layer w10: v1(2686,1600) 2802,1600 2822,1620 2822,1691 2837,1706 2967,1706 3003,1670 v1(3003,1668) ; v1@2691.3,1594.7 cw(c2704.11,1581.89) 2704.11,1600 cw(c2704.11,1618.11) v1@2691.3,1605.3 ; 2988.78,1684.22 cw(c2972.57,1668) v1@2995.5,1668 ; 2993.61,1679.39 ccw(c3003,1688.78) v1@3003,1675.5
M_UART_RXD: R15.2 R66.2 U1.61 | length 2362
  Top Layer w10: U1.61@2625.99,1671.01 U1.61@2625.99,1641.84 2661.98,1641.84 ; R15.2@2645.56,1774.58 cw(c2605.91,1734.92) 2661.98,1734.92 ; R15.2@2650.98,1782 2661.98,1771 2661.98,1641.84 ; R15.2@2652.63,1781.65 cw(c2630.05,1759.07) 2661.98,1759.07 ; R66.2@4311.58,1171.58 ccw(c4293.65,1153.65) 4293.65,1179 ccw(c4293.65,1204.35) R66.2@4311.58,1186.42 ; R66.2@4321,1179 4166,1179 4148,1197 4148,1425.15 4147.6,1425.55 4147.6,1526 4130,1543.6 3381,1543.6 3184.75,1543.6 3172.65,1555.7 2868.8,1555.7 2833,1591.5 2740.5,1591.5 2690.16,1641.84 2661.98,1641.84
M_UART_RXD4: P1.16 R77.1 R82.2 U1.2 | length 5811.2
  Top Layer w8: P1.16@183,1430.26 206.74,1430.26 250,1387 315,1387 383.8,1455.8 948.8,1455.8 980,1487 1011,1487 1052,1446 1352,1446 v1@1389,1483 ; P1.16@183.08,1428.73 cw(c186.01,1375.27) 223.87,1413.13 ; P1.16@183.52,1420.75 cw(c187.32,1351.25) 236.53,1400.47 ; P1.16@183.96,1412.76 cw(c188.64,1327.23) 249.2,1387.8 ; 1370.25,1464.25 cw(c1395,1439.49) v1@1395,1474.5 ; v1@1724.99,1499.01 ccw(c1702.27,1521.73) 1734.4,1521.73 ; v1@1734,1490 v1(1731,1493) 1734.4,1496.4 1734.4,1539 1761.4,1566 1866,1566 R82.2@1897,1535 1903.8,1541.8 1974.8,1541.8 2033.15,1600.15 ; 1734.4,1505.31 ccw(c1743.31,1505.31) v1@1737.01,1499.01 ; 1873.95,1558.05 cw(c1850.91,1535) R82.2@1883.5,1535 ; 1878.78,1553.22 ccw(c1895,1569.43) R82.2@1895,1546.5 ; R82.2@1901.47,1532.53 cw(c1923.87,1510.13) 1923.87,1541.8 ; R82.2@1907.13,1526.87 cw(c1943.18,1490.82) 1943.18,1541.8 ; v1(1971,1807) 1971,1806 1970,1805 1977.4,1797.6 2049.46,1797.6 2072.06,1820.2 2671.8,1820.2 2690,1802 2690,1672 2753.7,1608.3 2839.96,1608.3 2875.76,1572.5 3179.6,1572.5 3191.7,1560.4 4153,1560.4 4164.4,1549 4164.4,1432.91 4198.91,1398.4 4264.6,1398.4 4285.7,1377.3 4285.7,1344.61 4315,1315.31 R77.1@4315,1305 R77.1@4314,1305 ; v1@1997.49,1628.99 cw(c1997.49,1608.47) 2012,1622.98 cw(c2026.51,1637.49) v1@2005.99,1637.49 ; v1(1997.49,1637.49) 2085.66,1549.32 U1.2@2179.14,1549.32 U1.2@2177.16,1551.3 ; 4284.66,1345.65 cw(c4244.01,1305) R77.1@4301.5,1305 ; 4298.32,1331.99 cw(c4271.33,1305) R77.1@4309.5,1305
  Bottom Layer w8: v1@1395,1474.5 cw(c1395,1429.84) 1426.58,1461.42 ; v1@1395,1482.5 cw(c1395,1457.15) 1412.92,1475.08 ; v1@1405,1483 1428.2,1459.8 1650.8,1459.8 1684,1493 v1(1731,1493) ; v1@1724.99,1486.99 ccw(c1710.48,1472.48) 1710.48,1493 ccw(c1710.48,1513.52) v1@1724.99,1499.01 ; v1@1971,1798.5 cw(c1971,1777.98) 1985.51,1792.49 cw(c2000.02,1807) v1@1979.5,1807 ; v1(1971,1807) 1992,1786 1992,1642.98 v1(1997.49,1637.49) v1@1998,1638 ; 1992,1651.96 ccw(c2011.96,1651.96) v1@1997.85,1637.85 ; 1992,1671.27 ccw(c2031.27,1671.27) v1@2003.5,1643.5
  other v1: 1395,1483
M_UART_TXD: R68.2 U1.60 | length 2054.4
  Top Layer w10: U1.60@2698.83,1569.01 2823,1569.01 2823.71,1568.3 2828.48,1568.3 2858.88,1537.9 3165.27,1537.9 3177.37,1525.8 3339,1525.8 4108,1525.8 4129.8,1504 4129.8,1417.78 4130.2,1417.38 4130.2,1189.63 4158.63,1161.2 4278,1161.2 4320,1119.2 R68.2@4320,1112 ; 4293.57,1145.63 cw(c4259.94,1112) R68.2@4307.5,1112 ; 4310.64,1128.56 cw(c4294.08,1112) R68.2@4317.5,1112
M_UART_TXD4: P1.14 R76.1 U1.1 | length 5549.9
  Top Layer w8: P1.14@183,1330.26 224.55,1330.26 ; P1.14@205.77,1318.72 cw(c224.55,1309.21) 224.55,1330.26 ; P1.14@205.77,1341.8 ccw(c224.55,1351.31) 224.55,1330.26 ; v1@1383.5,1443.78 cw(c1364.7,1443.3) 1378,1430 ; v1@1391.78,1435.5 ccw(c1391.3,1416.7) 1378,1430 ; v1(1392,1444) 1378,1430 ; v1@1693.99,1467.01 ccw(c1679.48,1481.52) 1700,1481.52 ccw(c1720.52,1481.52) v1@1706.01,1467.01 ; v1(1700,1461) 1700,1509.19 1718.6,1527.79 1718.6,1634 1746.6,1662 v1(2033,1662) 2033,1624.33 2088.32,1569.01 U1.1@2179.14,1569.01 ; v1(2003,1822) 2003,1821 2010.6,1813.4 2042.91,1813.4 2065.51,1836 2225,1836 2678.34,1836 2705.8,1808.54 2705.8,1678.54 2760.24,1624.1 2846.5,1624.1 2877.3,1593.3 3181.15,1593.3 3198.25,1576.2 4166.46,1576.2 4180.2,1562.46 4180.2,1439.46 4205.46,1414.2 4279.8,1414.2 4315,1379 R76.1@4315,1365 ; v1@2003.36,1822.34 ccw(c2024.24,1842.23) 2024.24,1813.4 ; v1@2009.15,1827.86 ccw(c2042.91,1860.02) 2042.91,1813.4 ; v1@2026.99,1668.01 cw(c2012.48,1682.52) 2012.48,1662 cw(c2012.48,1641.48) 2026.99,1655.99 cw(c2012.48,1641.48) 2033,1641.48 cw(c2053.52,1641.48) v1@2039.01,1655.99 ; 224.55,1330.26 265.88,1288.93 421.28,1288.93 556.54,1424.2 1004.57,1424.2 1010.37,1430 1378,1430
  Bottom Layer w8: v1(1392,1444) 1683,1444 v1(1700,1461) ; v1@1398.01,1437.99 cw(c1412.52,1423.48) 1412.52,1444 cw(c1412.52,1464.52) v1@1398.01,1450.01 ; v1@1691.5,1461 cw(c1670.98,1461) 1685.49,1446.49 cw(c1700,1431.98) v1@1700,1452.5 ; v1@1996.99,1815.99 cw(c1970.89,1789.89) 2007.8,1789.89 ; v1@2002.65,1821.65 cw(c1990.2,1809.2) 2007.8,1809.2 ; v1(2003,1822) 2001,1820 2000,1820 2007.8,1812.2 2007.8,1677 2022.8,1662 v1(2033,1662) ; 2012.9,1671.9 ccw(c2022.57,1681.57) v1@2029,1669.5 ; 2020.54,1664.26 ccw(c2027.88,1671.61) v1@2032.76,1662.44
MN_HIC_EXT: R81.2 U1.59 | length 1653.5
  Top Layer w8: R81.2@1519.01,1400.23 1687,1568.22 1687,1647.09 1742.71,1702.8 2068.54,1702.8 2144.34,1627 ; R81.2@1520.78,1411.95 ccw(c1520.78,1435.99) 1537.77,1418.99 ; R81.2@1532.28,1400.45 cw(c1563.77,1400.45) 1541.5,1422.72 ; v1@2155.34,1621.7 ccw(c2144.35,1612.95) 2144.35,1627 ; v1@2155.34,1632.3 cw(c2144.35,1641.05) 2144.35,1627 ; v1(2161.98,1627) 2144.34,1627
  Top Layer w10: v1@2219.7,1630.7 cw(c2186.93,1597.93) 2233.27,1597.93 ; v1(2225,1636) 2233.27,1627.73 2233.27,1598.66 2249.47,1582.47 2295.53,1582.47 2352.2,1525.8 2611.45,1525.8 2633.09,1547.44 2649.09,1547.44 2650,1548.34 U1.59@2684.98,1548.34 ; v1@2226.77,1637.77 cw(c2211.07,1622.07) 2233.27,1622.07
  Bottom Layer w10: v1@2160.22,1628.77 cw(c2177.68,1611.31) 2177.68,1636 ; v1(2161.98,1627) 2170.98,1636 v1(2225,1636) ; v1@2167.29,1621.7 cw(c2201.82,1587.17) 2201.82,1636 ; v1@2219.7,1630.7 ccw(c2206.89,1617.89) 2206.89,1636 ccw(c2206.89,1654.11) v1@2219.7,1641.3
MN_HIC_RXD: R78.2 R80.2 U1.58 | length 1986.5
  Top Layer w8: R80.2@1518.78,1465 1556.53,1465 ; R80.2@1523.38,1458.21 cw(c1538.6,1444.56) 1538.6,1465 ; R80.2@1528.91,1468.68 ccw(c1537.79,1477.55) 1537.79,1465 ; R80.2@1529.34,1452.87 cw(c1556.52,1428.48) 1556.52,1465 ; v1@2184.97,1608.01 ccw(c2170.46,1622.52) 2190.98,1622.52 ccw(c2211.51,1622.52) v1@2196.99,1608.01 ; v1@2186.28,1606.7 v1(2190.98,1602) 2190.98,1644.02 2171.16,1663.84 2129.84,1663.84 2075.09,1718.6 1736.17,1718.6 1671.2,1653.63 1671.2,1579.67 1556.53,1465 ; U1.58@2698.83,1529.64 2776,1529.64 2789,1516.64 2789,1480 2838,1431 R78.2@2838,1425 ; 2810.71,1458.29 cw(c2777.42,1425) R78.2@2824.5,1425 ; 2824.37,1444.63 cw(c2804.74,1425) R78.2@2832.5,1425
  Top Layer w10: v1@2270.37,1558.89 cw(c2280.71,1546.92) 2291.89,1558.11 ; v1(2272,1557) 2272,1560 2271,1561 2289,1561 ; v1@2276.9,1551.32 cw(c2287.76,1538.76) 2299.5,1550.5 ; v1@2278.96,1554.21 cw(c2289,1550.19) 2289,1561 ; U1.58@2697.92,1528.73 U1.58@2698.83,1529.64 2640.46,1529.64 2618.83,1508 2342,1508 2289,1561
  Bottom Layer w10: v1(2190.98,1602) 2213.17,1602 2255.17,1560 ; v1@2196.29,1596.7 cw(c2209.09,1583.89) 2209.09,1602 cw(c2209.09,1620.11) v1@2196.29,1607.3 ; 2235.59,1579.58 ccw(c2272,1615.99) v1@2272,1564.5 ; 2252.66,1562.51 ccw(c2272,1581.85) v1@2272,1554.5 ; v1@2265.26,1553.7 ccw(c2255.17,1548.77) 2255.17,1560 ; v1(2272,1557) 2272,1560 2255.17,1560
MN_HIC_TXD: R79.2 U1.57 | length 1683.3
  Top Layer w8: R79.2@1518.78,1340.02 1518.78,1350.31 1702.8,1534.33 1702.8,1640.54 1749.26,1687 2062,1687 2128.98,1620.02 ; R79.2@1524.28,1340.36 cw(c1561.58,1340.36) 1535.2,1366.74 ; R79.2@1532.28,1340.36 cw(c1588.89,1340.36) 1548.86,1380.39 ; v1@2123.88,1609.8 ccw(c2116.2,1620.01) 2128.98,1620.01 ; v1(2128.98,1603) 2128.98,1620.02 ; v1@2134.09,1609.8 cw(c2141.76,1620.01) 2128.98,1620.01
  Top Layer w10: v1@2267,1516.5 cw(c2267,1498.39) 2279.8,1511.2 cw(c2292.61,1524) v1@2274.5,1524 ; v1(2267,1524) 2300.8,1490.2 2569,1490.2 ; 2576,1490.2 2569,1490.2 ; U1.57@2697.85,1510.93 U1.57@2698.83,1509.95 2645.95,1509.95 2626.2,1490.2 2569,1490.2
  Bottom Layer w10: v1@2128.98,1595.5 cw(c2128.98,1577.39) 2141.79,1590.2 cw(c2154.59,1603) v1@2136.48,1603 ; v1(2128.98,1603) 2155.28,1576.7 2213.3,1576.7 2266.5,1523.5 v1(2267,1524) ; 2252.49,1537.51 ccw(c2267,1552.02) v1@2267,1531.5 ; 2254.9,1535.1 cw(c2243.81,1524) v1@2259.5,1524
MOT_AD1: C29.2 D1.2 R71.1 R73.1 U1.78 | length 3392.1
  Top Layer w8: C29.2@490,2126.01 cw(c490,2101.93) 507.03,2118.96 ; C29.2@490,2139.51 490,2135.98 R71.1@550.98,2075 ; C29.2@501.5,2137.51 ccw(c532.94,2137.51) 510.71,2115.27 ; 527.94,2098.05 ccw(c550.98,2121.09) R71.1@550.98,2088.5 ; 532.77,2093.22 cw(c516.55,2077) R71.1@539.48,2077 ; R71.1@542.85,2064.87 cw(c523.22,2045.24) 550.98,2045.24 cw(c578.75,2045.24) R71.1@559.12,2064.87 ; R71.1@559.12,2066.87 cw(c578.75,2047.24) 578.75,2075 cw(c578.75,2102.76) R71.1@559.12,2083.13 ; 583,1837 583,1858 ; D1.2@598.04,1670.5 ccw(c546.48,1673.48) 583,1710 ; R73.1@602.85,2066.87 ccw(c583.22,2047.24) 583.22,2075 ccw(c583.22,2102.76) R73.1@602.85,2083.13 ; D1.2@606.03,1670.04 ccw(c570.33,1672.1) 595.62,1697.38 ccw(c620.9,1722.67) D1.2@622.96,1686.97 ; R73.1@610.98,2075 R71.1@550.98,2075 ; D1.2@622.5,1694.96 cw(c619.52,1746.52) 583,1710 ; D1.2@624,1679 D1.2@624,1669 ; D1.2@624.99,1670.74 ccw(c637.71,1693.13) 655.92,1674.92 ; D1.2@628.94,1677.69 ccw(c643.09,1702.6) 663.35,1682.35 ; D1.2@632.89,1684.65 ccw(c648.47,1712.08) 670.77,1689.77 ; D1.2@636.84,1691.61 ccw(c653.85,1721.55) 678.2,1697.2 ; 2227.7,1916.67 ccw(c2245,1933.97) v1@2245,1909.5 ; 2231.65,1912.72 cw(c2219.93,1901) v1@2236.5,1901 ; v1(2245,1901) 2243.37,1901 2220.57,1923.8 2094.31,1923.8 2064.31,1893.8 1413.8,1893.8 1386,1866 731,1866 678.2,1813.2 678.2,1697.2 ; v1@2279,1711.5 cw(c2279,1700.64) 2286.68,1708.32 ; v1(2279,1720) 2277,1718 2291.35,1703.65 U1.78@2291.35,1641.84 ; v1@2286.94,1716.96 ccw(c2296.86,1713.16) 2289.35,1705.65 ; R71.1@550.98,2075 550.98,1999.02 583,1967 583,1858 ; 583,1710 D1.2@624,1669 ; 583,1710 583,1858 ; D1.2@624,1669 650,1669 678.2,1697.2
  Bottom Layer w8: 2235.3,1866.32 cw(c2268.95,1866.32) v1@2249.83,1894.01 ; 2235.3,1881.56 cw(c2258.42,1881.56) v1@2245.28,1900.59 ; v1(2245,1901) 2243,1901 2235.3,1893.3 2235.3,1867.7 2211.6,1844 2211.6,1787.4 v1(2279,1720) ; v1@2270.5,1720 ccw(c2249.98,1720) 2264.49,1734.51 ccw(c2279,1749.02) v1@2279,1728.5
MOT_AD2: C30.2 D2.2 R72.1 R74.1 U1.79 | length 4020.7
  Top Layer w8: C30.2@199.98,2144.51 318.48,2144.51 R72.1@320.98,2142 329.98,2151 v1(407,2151) ; C30.2@208.12,2136.38 cw(c227.75,2116.75) 227.75,2144.51 cw(c227.75,2172.27) C30.2@208.12,2152.64 ; 231.99,2144.51 cw(c231.99,2115.01) R74.1@252.85,2135.87 ; 234.45,2144.51 ccw(c234.45,2170.53) R74.1@252.85,2152.13 ; R74.1@269.12,2135.87 cw(c289.98,2115.01) 289.98,2144.51 ; R74.1@269.12,2152.13 ccw(c287.52,2170.53) 287.52,2144.51 ; 291.99,2144.51 cw(c291.99,2115.01) R72.1@312.85,2135.87 ; 294.45,2144.51 ccw(c294.45,2170.53) R72.1@312.85,2152.13 ; R72.1@323.46,2141.53 cw(c346.33,2118.65) 346.33,2151 ; R72.1@329.12,2135.87 cw(c365.65,2099.34) 365.65,2151 ; v1@400.99,2144.99 ccw(c386.48,2130.48) 386.48,2151 ccw(c386.48,2171.52) v1@400.99,2157.01 ; v1(477,1997) 478,1996 530,1996 563,1963 563,1831 ; v1@483.01,1990.99 cw(c495.11,1978.89) 495.11,1996 ; v1@483.01,2003.01 ccw(c499.94,2019.93) 499.94,1996 ; 563,1737 563,1831 ; 575.5,1597.5 ccw(c598.46,1620.46) D2.2@614.86,1592.44 ; 582.83,1590.17 ccw(c603.87,1611.22) D2.2@618.91,1585.53 ; 590.15,1582.85 ccw(c609.28,1601.97) D2.2@622.95,1578.63 ; 597.48,1575.52 ccw(c614.69,1592.73) D2.2@626.99,1571.73 ; D2.2@628,1580 ccw(c628,1613.8) D2.2@651.9,1589.9 ; D2.2@628,1588 ccw(c628,1641.11) 665.56,1603.56 ; D2.2@628,1596 ccw(c628,1668.43) 679.21,1617.21 ; D2.2@646,1570 cw(c679.8,1570) D2.2@655.9,1593.9 ; D2.2@654,1570 cw(c707.11,1570) 669.56,1607.56 ; 2168.75,1908 cw(c2168.75,1856.75) v1@2204.99,1892.99 ; 2188.07,1908 cw(c2188.07,1876.07) v1@2210.65,1898.65 ; v1(2211,1899) 2202,1908 2100.86,1908 2070.86,1878 1422,1878 1394.2,1850.2 757.2,1850.2 694,1787 694,1632 632,1570 D2.2@628,1570 603,1570 563,1610 563,1831 ; v1@2242,1713.5 cw(c2242,1692.98) 2256.51,1707.49 cw(c2271.02,1722) v1@2250.5,1722 ; v1(2242,1722) 2271.66,1692.34 U1.79@2271.66,1641.84
  Bottom Layer w8: v1@400.99,2144.99 cw(c386.48,2130.48) 407,2130.48 cw(c427.52,2130.48) v1@413.01,2144.99 ; v1(407,2151) 407,2067 v1(477,1997) ; v1@468.5,1997 ccw(c447.98,1997) 462.49,2011.51 ccw(c477,2026.02) v1@477,2005.5 ; v1@2204.99,1892.99 cw(c2190.48,1878.48) 2211,1878.48 cw(c2231.52,1878.48) v1@2217.01,1892.99 ; v1(2211,1899) 2211,1875 2203.3,1867.3 2203.3,1866.93 2195.8,1859.43 2195.8,1775 2242,1728.8 2242,1723 v1(2242,1722) ; 2222.68,1748.12 cw(c2196.56,1722) v1@2233.5,1722 ; 2236.34,1734.46 cw(c2223.88,1722) v1@2241.5,1722
MOTO_1: P1.18 R64.2 R71.2 | length 1196.9
  Top Layer w20: P1.18@182.53,1530.26 cw(c238.7,1530.26) 198.98,1569.98 ; P1.18@183,1530.26 188,1535.26 188,1559 235.67,1606.67 235.67,1799.36 348.78,1912.47 348.78,1973.78 385,2010 440,2010 456,2026 456,2184 R64.2@400,2240 ; P1.18@202.53,1530.26 cw(c306.99,1530.26) 233.12,1604.12 ; R64.2@400,2220 cw(c400,2171.72) 434.14,2205.86 cw(c468.28,2240) R64.2@420,2240 ; 463,2177 515.98,2177 R71.2@550.98,2142 ; R71.2@538.18,2154.8 ccw(c550.98,2167.61) R71.2@550.98,2149.5
MOTO_2: P1.20 R64.1 R72.2 | length 771.6
  Top Layer w20: P1.20@169.19,1644.07 ccw(c135.86,1677.4) 183,1677.4 ccw(c230.14,1677.4) P1.20@196.81,1644.07 ; P1.20@183,1630.26 183,1786 320.98,1923.98 R72.2@320.98,2075 ; 366.14,2075 ccw(c366.14,2120.72) R64.1@400,2090 385,2075 R72.2@320.98,2075 ; R64.1@385.19,2103.44 cw(c320.99,2161.68) R72.2@320.98,2075